# Altium PCB PCB1.PcbDoc
Units mil, origin at the board's own origin, x right, y up, seen from the top; angles counter-clockwise.
Board outline 3290 x 1870 mil, 2 copper layers (Top Layer, Bottom Layer); 100 components, 62 nets, 292 pads, 26 vias.
Unrouted connection lines stored in the file: 85.
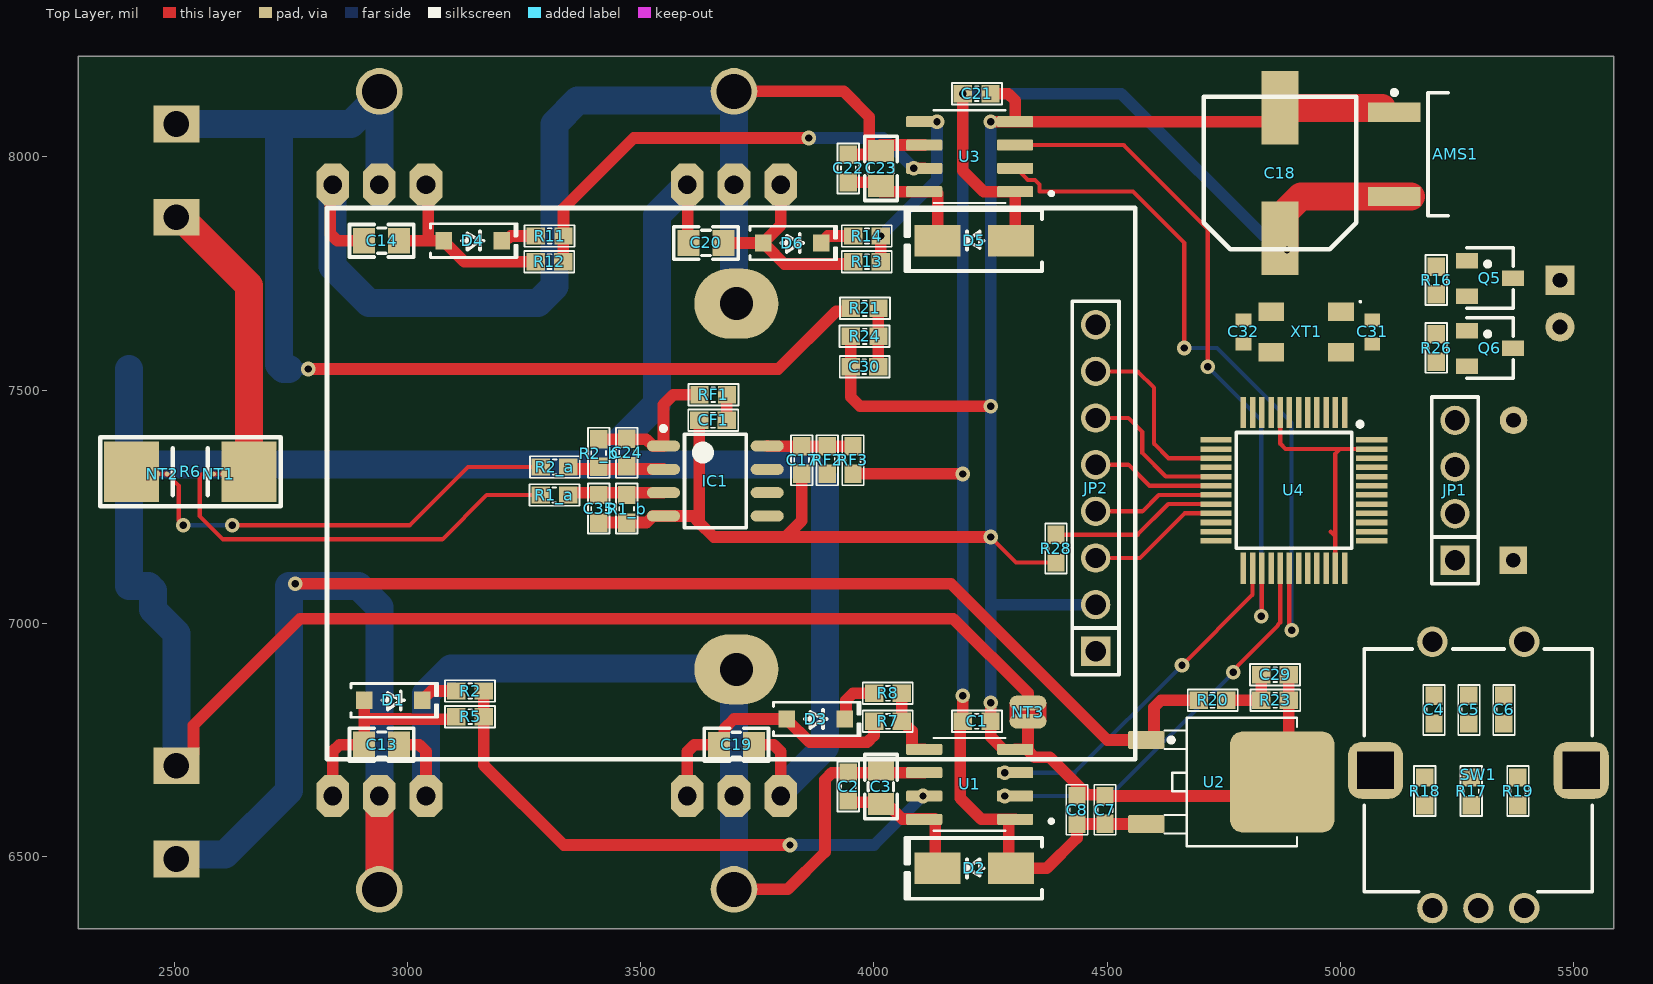
[diagram p0: Top Layer view]
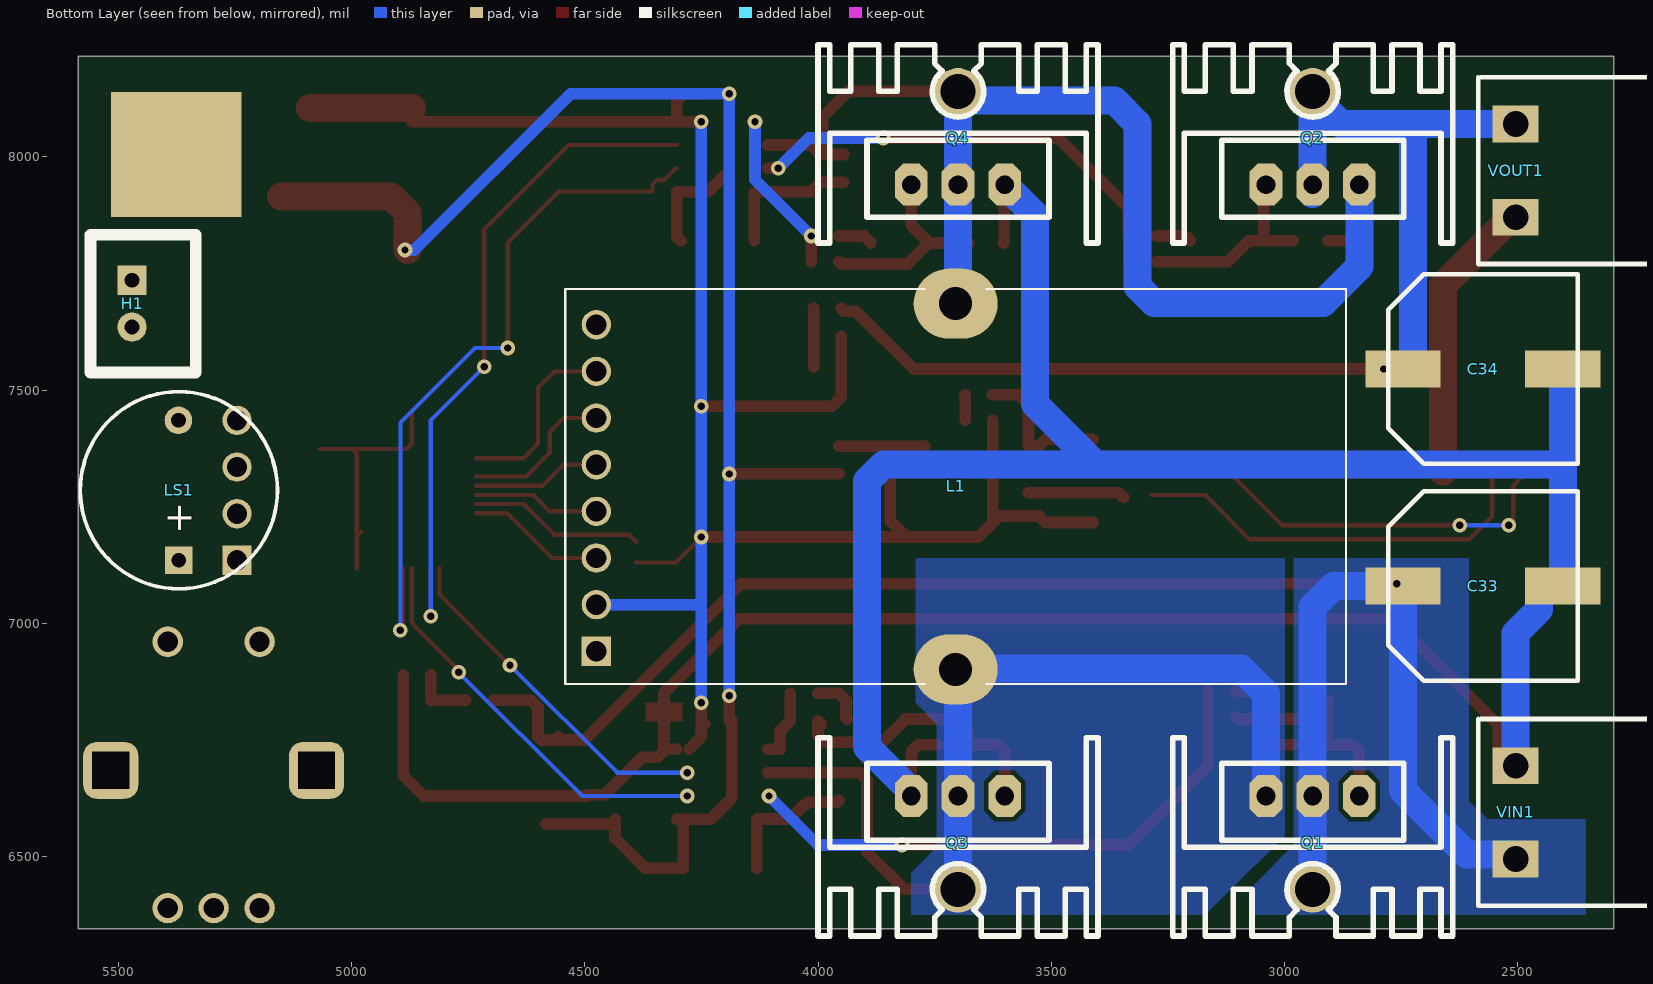
[diagram p1: Bottom Layer view, seen from below]

## Layer stack, top to bottom
Top Solder: solder mask 0.4, Solder Resist, Dk 3.5
Top Layer: signal copper 1.4
Dielectric 1: dielectric 12.6, FR-4, Dk 4.8
Bottom Layer: signal copper 1.4
Bottom Solder: solder mask 0.4, Solder Resist, Dk 3.5

## Board outline
2295,6345 2295,8215 5585,8215 5585,6345

## Design rules (kind name [scope] priority, off if disabled: settings)
Clearance [All] p1: gap=9 ignorepadtopadclearanceinfootprint=FALSE
PlaneConnect [All] p1: planeconnectstyle=Direct reliefexpansion=20 reliefentries=4 reliefconductorwidth=10 reliefairgap=10
PolygonConnect [All] p1: connectstyle=Direct reliefconductorwidth=10 reliefentries=4 polygonreliefangle="90 Angle" airgapwidth=10
RoomDefinition Sheet2 [InComponentClass('Sheet2')] p1: confinementstyle=ConfineIn formatcopy=TRUE lockcomponents=FALSE outline 7045,1060 19970,1060 19970,4730 7045,4730
RoutingVias [All] p1: holewidth=15.75 width=31.5 viastyle="Through Hole" minholewidth=15.75 minwidth=31.5 maxholewidth=15.75 maxwidth=31.5
SolderMaskExpansion [All] p1: expansion=4 istentingtop=FALSE
Width [All] p1: maxlimit=60 minlimit=9 preferedwidth=25
29 further rules are at their usual default settings.

## Components (designator, comment, footprint, x,y, rotation, side; value= is the part's Value field where it differs from the comment)
AMS1 "AMS1117" "TO 252" 5048.86,7863.62 r0 top
BT1 "Nut Nhan 2 Chan SMD 3x6x2.5" "Nut Nhan 2 Chan SMD 3x6x2.5" 8050,4455 r90 top
C1 "104" "tu 0603" 4220,6790 r0 top
C2 "104" "tu 0603" 3945,6650 r90 top
C3 "104" "tu 0805" 4015,6650 r270 top
C4 "104" "tu 0603" 5200,6815 r270 top
C5 "104" "tu 0603" 5275,6815 r270 top
C6 "104" "tu 0603" 5350,6815 r270 top
C7 "104" "tu 0603" 4495,6600 r90 top
C8 "104" "tu 0603" 4435,6600 r90 top
C9 "104" "tu 0603" 4360,8685 r0 top
C10 "104" "tu 0603" 5215,8520 r270 top
C11 "104" "tu 0603" 4720,8650 r90 top
C12 "104" "tu 0603" 4920,8650 r90 top
C13 "100" "tu 0805" 2945,6740 r180 top
C14 "100" "tu 0805" 2945,7819.87 r180 top
C15 "1000uF" "tu hoa 10mm" 4595,2691.73 r180 bottom
C16 "1000uF" "tu hoa 10mm" 2815,2690 r0 bottom
C17 "104" "tu 0603" 3845,7350 r270 top
C18 "100uF" "tu nhom 8 (f)" 4870,7965 r90 top
C19 "100" "tu 0805" 3705,6740 r0 top
C20 "100" "tu 0805" 3640,7815 r180 top
C21 "104" "tu 0603" 4220,8135 r0 top
C22 "104" "tu 0603" 3945,7975 r270 top
C23 "104" "tu 0805" 4015,7975 r270 top
C24 "100" "tu 0603" 3470,7366 r270 top
C25 "102" "tu 0603" 2935.47,4145 r0 top
C26 "0.1uF" CAPC1608X09L 3255,4345 r270 top
C27 "0.1uF" CAPC1608X09L 3155,4345 r270 top
C28 "0.1uF" CAPC1608X09L 3360,4340 r270 top
C29 "102" "tu 0603" 4859.53,6890 r180 top
C30 "102" "tu 0603" 3979.53,7550 r0 top
C31 "10pF" CAPC1608X09L 5067.53,7624.39 r90 top
C32 "10pF" CAPC1608X09L 4791.76,7624.39 r270 top
C33 "1000uF" "tu nhom 10 (G)" 2575,7080 r180 bottom
C34 "1000uF" "tu nhom 10 (G)" 2575,7545 r180 bottom
C35 "100" "tu 0603" 3410,7245.47 r90 top
CF1 "104" "tu 0603" 3655,7435 r0 top
D1 "S4" "DIODE SOD-123" 2970,6835 r0 top
D2 "SS34" "DIODE SMA" 4215,6475 r180 top
D3 "S4" "DIODE SOD-123" 3875,6795 r0 top
D4 "S4" "DIODE SOD-123" 3140,7820 r0 top
D5 "SS34" "DIODE SMA" 4215,7820 r180 top
D6 "S4" "DIODE SOD-123" 3825,7815 r0 top
D7 "SS34" "DIODE SMA" 6045,5606.26 r90 top
H1 "FAN" XH2.54M-2 5470,7735 r270 bottom
IC1 "LM358 SOP8" "SOP 8" 3660,7305 r0 top
JP1 "debug" "JP 1x4 DT" 5245,7135 r90 top
JP2 "lcd_1.8 inch" "JP 1x8 DT" 4475,6940 r90 top
L1 "ATCA-08-251M-V" IND_ATCA-08-251M-V 3705,7293.27 r90 bottom locked
L3 "LED 0805" LED-0805-Red 12020,4585 r0 top
LS1 "Coi Chip Speaker" "Coi Chip Speacker" 5370,7135 r90 bottom
NT1 "0.25mm" NetTie_0.25mm 2604.68,7320 r180 top net-tie
NT2 "0.25mm" NetTie_0.25mm 2465.32,7320 r0 top net-tie
NT3 "NetTie_2mm" NetTie_2mm 4330,6829.37 r270 top net-tie
NTC1 "10k" MF52 2937.27,4056.52 r0 top
Q1 "IRFZ44" QTO-220H3 2840,6630 r0 bottom locked
Q2 "IRFZ44" QTO-220H3 3040,7940 r180 bottom
Q3 "IRFZ44" QTO-220H3 3600,6630 r0 bottom locked
Q4 "IRFZ44" QTO-220H3 3800,7940 r180 bottom
Q5 "HF" SOT-23 5320,7740 r270 top value=C9014
Q6 "HF" SOT-23 5320,7590 r270 top value=C9014
R1_a "10K" "Tro smd 0603" 3315,7275 r0 top
R1_b "30K" "Tro smd 0603" 3470,7245.47 r90 top
R2 "2.2R" "Tro smd 0603" 3134.53,6855 r180 top
R2_a "10K" "Tro smd 0603" 3315.47,7335 r0 top
R2_b "30K" "Tro smd 0603" 3410,7365 r90 top
R5 "10R" "Tro smd 0603" 3134.53,6800 r180 top
R6 "0.01R" "tro smd 2512" 2535,7325 r0 top
R7 "10R" "Tro smd 0603" 4030,6790 r180 top
R8 "2.2R" "Tro smd 0603" 4030,6850 r180 top
R11 "2.2R" "Tro smd 0603" 3305,7830 r180 top
R12 "10R" "Tro smd 0603" 3304.53,7775 r180 top
R13 "10R" "Tro smd 0603" 3985,7775 r180 top
R14 "2.2R" "Tro smd 0603" 3985,7830 r180 top
R15 "10k" "tro smd 0603" 3065,4145 r180 top
R16 "4.7K" "Tro smd 0603" 5205,7735 r90 top
R17 "10k" "Tro smd 0603" 5280,6640 r90 top
R18 "10k" "Tro smd 0603" 5180,6640 r90 top
R19 "10k" "Tro smd 0603" 5380,6640 r90 top
R20 "10k" "tro smd 0603" 4725.47,6835 r0 top
R21 "10k" "tro smd 0603" 3980,7675 r0 top
R22 "10k" "Tro smd 0603" 3720,4155 r0 top
R23 "100k" "tro smd 0603" 4859.53,6835 r0 top
R24 "100k" "tro smd 0603" 3980,7615 r180 top
R25 "10k" "Tro smd 0603" 4215,4655 r0 top
R26 "4.7K" "Tro smd 0603" 5205,7590 r90 top
R27 "10k" "Tro smd 0603" 3940,4450 r90 top
R28 "10k" "Tro smd 0603" 4390,7160 r90 top
RF1 "10K" "Tro smd 0603" 3655.47,7490 r0 top
RF2 "0R" "Tro smd 0603" 3900,7350 r270 top
RF3 "0R" "Tro smd 0603" 3955,7350 r270 top
SW1 "482024764004" 482024764004 5295,6685 r270 top
U1 "IR2101S" SOIC127P600X175-8N 4205,6655 r180 top
U2 "78M12 SMD TO252" TO252 4729.33,6660 r270 top
U3 "IR2101S" SOIC127P600X175-8N 4205,8000 r180 top
U4 "STM32F103C8T6" LQFP-48_19.6_393_58X11_SMD 4900,7285 r270 top
VIN1 "CON 2 EDG5.08" "CON 2 2EDG5.08" 2505,6695 r270 bottom
VOUT1 "CON 2 EDG5.08" "CON 2 2EDG5.08" 2505,8070 r270 bottom
XT1 "8 MHz" DFN220P320X110-4N 4926.11,7624.39 r180 top

## Footprints (in the part's own frame and the unit in brackets; to place one, negate y for a bottom-side part, rotate by r counter-clockwise, add the part's x,y. Pads: shape width x height; smd on the part's side, far side on the other; paste and mask are expansions set on the pad)
482024764004 [mm]
  round 1.65 hole 1.1: 1(-7,-2.5) 2(-7,2.5) A(7.5,-2.5) B(7.5,2.5) C(7.5,0)
  rrect50% 3.1x3 hole 2 square: S1(0,5.6) S2(0,-5.6)
  silkscreen extent -6.6,-6.2 6.6,6.2, body extent -7.32,-6.81 7.8,6.81, height 20.1
CAPC1608X09L [mm]
  rect 0.7x0.85 smd: 1(-0.65,0) 2(0.65,0)
  body extent -0.85,-0.45 0.85,0.45, height 0.9
"Coi Chip Speacker" [mm]
  rect 1.5x1.5 hole 0.8: 1(0,0)
  round 1.5 hole 0.8: 2(7.62,0.013)
  silkscreen extent -1.55,-5.38 9.18,5.36, body extent -2.22,-6 13.24,6, height 4.5
"CON 2 2EDG5.08" [mm]
  rect 2x2.5 hole 1.4: 1(0,0) 2(5.08,0)
  silkscreen extent -2.54,-2.03 7.62,10.21, body extent -2.5,-1.75 7.58,10.25, height 3.15
DFN220P320X110-4N [mm]
  rect 1.4x1 smd: 1(-1.9,-1.1) 3(1.9,1.1) G(-1.9,1.1) G(1.9,-1.1)
  silkscreen extent -3,-1.7 -2.9,-1.6, body extent -2.55,-1.65 2.55,1.65, height 1.1
"DIODE SMA" [mm] "SMA"
  rect 2.5x1.7 smd: 1(-2,0) 2(2,0)
  silkscreen extent -3.68,-1.65 3.75,1.65, body extent -2.6,-1.37 2.6,1.37, height 2.4
"DIODE SOD-123" [mm] "SOD-123"
  rect 0.9x0.95 smd: 1(-1.575,0) 2(1.575,0)
  silkscreen extent -2.3,-0.92 2.41,0.92, body extent -1.86,-0.78 1.86,0.77, height 1.35
IND_ATCA-08-251M-V [mm]
  oval 3.81x4.572 hole 1.8: 1(-9.95,0) 2(9.95,0)
  silkscreen extent -10.75,-21.25 10.75,21.25, body extent -21.45,-10.75 21.45,10.75, height 21.45
"JP 1x4 DT" [mm] "4 pins, 1 row, straight, gold plating"
  rect 1.6x1.6 hole 1.1: 1(0,0)
  round 1.6 hole 1.1: 2(2.54,0) 3(5.08,0) 4(7.62,0)
  silkscreen extent -1.27,-1.27 8.89,1.27, body extent -1.27,-1.27 8.89,1.27, height 8.54
"JP 1x8 DT" [mm] "8 pins, 1 row, straight, gold plating"
  rect 1.6x1.6 hole 1.1: 1(0,0)
  round 1.6 hole 1.1: 2(2.54,0) 3(5.08,0) 4(7.62,0) 5(10.16,0) 6(12.7,0) 7(15.24,0) 8(17.78,0)
  silkscreen extent -1.27,-1.27 19.05,1.27, body extent -1.27,-1.27 19.05,1.27, height 8.54
LED-0805-Red [mil]
  rect 50x55 smd: 1(0,0) 2(90,0)
  silkscreen extent 0,-35 90,35, body extent 5,-25 85,25, height 43
LQFP-48_19.6_393_58X11_SMD [mm] "48LQFP"
  rect 1.7x0.3 smd mask+0.076: 1(-4.238,2.75) 2(-4.238,2.25) 3(-4.238,1.75) 4(-4.238,1.25) 5(-4.238,0.75) 6(-4.238,0.25) 7(-4.238,-0.25) 8(-4.238,-0.75) 9(-4.238,-1.25) 10(-4.238,-1.75) 11(-4.238,-2.25) 12(-4.238,-2.75) 25(4.238,-2.75) 26(4.238,-2.25) 27(4.238,-1.75) 28(4.238,-1.25) 29(4.238,-0.75) 30(4.238,-0.25) 31(4.238,0.25) 32(4.238,0.75) 33(4.238,1.25) 34(4.238,1.75) 35(4.238,2.25) 36(4.238,2.75)
  rect 0.3x1.7 smd mask+0.076: 13(-2.75,-4.238) 14(-2.25,-4.238) 15(-1.75,-4.238) 16(-1.25,-4.238) 17(-0.75,-4.238) 18(-0.25,-4.238) 19(0.25,-4.238) 20(0.75,-4.238) 21(1.25,-4.238) 22(1.75,-4.238) 23(2.25,-4.238) 24(2.75,-4.238) 37(2.75,4.238) 38(2.25,4.238) 39(1.75,4.238) 40(1.25,4.238) 41(0.75,4.238) 42(0.25,4.238) 43(-0.25,4.238) 44(-0.75,4.238) 45(-1.25,4.238) 46(-1.75,4.238) 47(-2.25,4.238) 48(-2.75,4.238)
  silkscreen extent -3.72,-3.15 3.15,3.73, body extent -4.5,-4.5 4.5,4.5, height 1.7
MF52 [mm]
  round 1 hole 0.55: 1(-0.869,-0.039) 2(0.831,-0.039)
  silkscreen extent -1.27,-1.29 1.23,1.21, body extent -1.24,-1.24 1.26,2.56, height 5.45
NetTie_0.25mm [mm]
  round 0.25 smd paste-2 mask+0.102: 1(0,0) 2(0.5,0)
  Top Layer region: 0,0.125 0.5,0.125 0.5,-0.125 0,-0.125
NetTie_2mm [mm]
  oval 0.8x2 smd paste-2 mask+0.102: 1(0,0) 2(1,0)
  Top Layer region: 0,1 1,1 1,-1 0,-1
"Nut Nhan 2 Chan SMD 3x6x2.5" [mm] "Switch SMD type"
  rect 1.2x0.8 smd: 1(-3.5,0) 2(3.5,0)
  silkscreen extent -2.82,-1.85 2.82,1.85, body extent -3.05,-1.85 3.05,1.85, height 2.5
QTO-220H3 [mil] "TO-220 1-2-3"
  oct 70x90 hole 40: 1(0,0) 2(100,0) 3(200,0)
  round 100 hole 75: 2(100,200)
  silkscreen extent -200,-125 400,300, body extent -190,-102 392,323, height 984
SOIC127P600X175-8N [mm]
  rrect25% 1.97x0.6 smd: 1(-2.475,1.905) 2(-2.475,0.635) 3(-2.475,-0.635) 4(-2.475,-1.905) 5(2.475,-1.905) 6(2.475,-0.635) 7(2.475,0.635) 8(2.475,1.905)
  silkscreen extent -4.54,-2.52 1.95,2.53, body extent -3,-2.5 3,2.5, height 1.75
"SOP 8" [mm] "SOIC, 8-Leads, Body 4.9x3.9mm, Pitch 1.27mm, IPC High Density"
  oval 1.8x0.6 smd: 1(-2.825,1.905) 2(-2.825,0.635) 3(-2.825,-0.635) 4(-2.825,-1.905) 5(2.825,-1.905) 6(2.825,-0.635) 7(2.825,0.635) 8(2.825,1.905)
  silkscreen extent -2.95,-2.55 1.68,2.98, body extent -2.99,-2.45 3,2.45, height 1.6
SOT-23 [mm] "SOT 23 _ 1-3-2"
  rect 0.85x1.2 smd: 1(-0.94,-1.245) 2(0.985,-1.25) 3(0.005,1.25)
  silkscreen extent -1.65,-1.27 1.65,1.27, body extent -1.47,-1.33 1.53,1.17, height 1.06
TO252 [mm] "TO252"
  round 0.5 on Mech15: 0(0,0)
  rrect25% 1x2 smd: 1(-2.285,-3.7) 3(2.285,-3.7)
  rrect25% 5.5x5.7 smd: 2(0,3.7)
  silkscreen extent -3.5,-2.7 3.5,4.5, body extent -3.3,-3.95 3.3,5.76, height 2.31
"TO 252" [mm]
  rect 2.85x1.05 smd: 1(1.684,5.881) 3(1.684,1.301)
  rect 7.1x6.8 smd far side: 2(8.284,3.591)
  silkscreen extent 1.56,0.24 4.61,7.08, body extent 1.25,0.35 10.92,6.89, height 2.29
"Tro smd 0603" [mm] "Chip Capacitor, 2-Leads, Body 1,60x0,80mm, IPC Medium Density"
  rect 1x0.95 smd mask+0.076: 1(-0.75,0) 2(0.75,0)
  silkscreen extent -1.35,-0.58 1.37,0.58, body extent -0.82,-0.42 0.82,0.43, height 0.44
"tro smd 0603" [mm] "Chip Capacitor, 2-Leads, Body 1,60x0,80mm, IPC Medium Density"
  rect 1x0.95 smd mask+0.076: 1(-0.75,0) 2(0.75,0)
  silkscreen extent -1.35,-0.58 1.37,0.58, body extent -0.82,-0.42 0.82,0.43, height 0.44
"tro smd 2512" [mm]
  rect 3x3.3 smd: 1(-3.2,0) 2(3.2,0)
  silkscreen extent -4.9,-1.88 4.93,1.88, body extent -3.12,-1.57 3.18,1.58, height 0.82
"tu 0603" [mm] "Chip Capacitor, 2-Leads, Body 1,60x0,80mm, IPC Medium Density"
  rect 1x0.95 smd mask+0.076: 1(-0.75,0) 2(0.75,0)
  silkscreen extent -1.35,-0.58 1.37,0.58, body extent -0.8,-0.4 0.8,0.4, height 0.9
"tu 0805" [mm] "Compoment SMD 80x50mil"
  rect 1.2x1.4 smd: 1(-0.946,-0.003) 2(0.954,-0.003)
  silkscreen extent -1.75,-0.89 1.75,0.89, body extent -1.01,-0.64 1.01,0.63, height 0.61
"tu hoa 10mm" [mm]
  rect 2.1x2.1 hole 0.9: 1(-2.54,0)
  round 2.1 hole 0.9: 2(2.54,0)
  silkscreen extent -4.95,-4.96 4.93,4.92, body extent -5,-5 5.01,5, height 20.01
"tu nhom 8 (f)" [mm]
  rect 4x2 smd: 1(-3.55,0) 2(3.55,0)
  silkscreen extent -4.15,-4.15 4.15,4.15, body extent -4.85,-4.25 4.85,4.25, height 10.5
"tu nhom 10 (G)" [mm]
  rect 4.1x2 smd: 1(-4.35,0) 2(4.35,0)
  silkscreen extent -5.15,-5.15 5.15,5.15, body extent -5.9,-5.25 5.9,5.25, height 10.5
XH2.54M-2 [mm]
  rect 1.6x1.6 hole 0.8: 1(0,0)
  round 1.6 hole 0.8: 2(2.54,0)
  silkscreen extent -2.48,-2.26 5.02,3.46, body extent -2.48,-2.26 5.02,3.48, height 6.91

## Part data
C1 C2 C4 C5 C6 C7 C8 C9 C10 C11 C12 C21 C22: library part "Tu 0603 101 50V 10%", "Dán", Chung_Loai=Dán, Don_Vi=Con, Ma_Hang=MH004565, So_Chan=2, Ten_Linh_Kien="Tụ 0603 101-0.1nF 10% 50V"
C3 C23: library part "Tu 0805 101 50V 20%", "Dán", Chung_Loai=Dán, Don_Vi=Con, Ma_Hang=MH002806, So_Chan=2, Ten_Linh_Kien="Tụ 0805 101-0.1nF 50V 20%"
C13 C14 C19 C20: library part "Tu 0805 104 50V 10%", "Dán", Chung_Loai=Dán, Don_Vi=Con, Ma_Hang=MH004551, So_Chan=2, Ten_Linh_Kien="Tụ 0805 104-100nF 10% 50V"
C15 C16: library part "Tu Hoa 1000uF 10V 10x12", "Cắm", Chung_Loai=Cắm, Don_Vi=Con, Ma_Hang=MH006614, So_Chan=2, Ten_Linh_Kien="Tụ Hóa 1000uF 10V 10x12MM"
C17 C24 C35 CF1: library part "Tu 0603 106 16V 20%", "Dán", Chung_Loai=Dán, Don_Vi=Con, Ma_Hang=MH004848, So_Chan=2, Ten_Linh_Kien="Tụ 0603-10uF 20% 16V"
C18: library part "Tu Nhom 100uF 50V", "Dán", Chung_Loai=Dán, Don_Vi=Con, Ma_Hang=MH002223, So_Chan=2, Ten_Linh_Kien="Tụ Nhôm 100uF 50V 8x10.2MM"
C25 C29 C30: library part "Tu 0603 104 50V 10%", "Dán", Chung_Loai=Dán, Don_Vi=Con, Ma_Hang=MH004568, So_Chan=2, Ten_Linh_Kien="Tụ 0603 104-100nF 10% 50V"
C26 C27 C28: library part GRM188R71H104KA93D, "CAP CER 0.1UF 50V X7R 0603", Manufacturer="Murata Electronics North America", Operating Temperature="-55°C ~ 125°C", Package / Case="0603 (1608 Metric)", Ratings=-, Supplier Part Number 1=490-1519-2-ND, Temperature Coefficient=X7R, Tolerance=±10%, Voltage - Rated=50V, Applications="General Purpose", Capacitance=0.1uF, Category=Capacitors, ComponentLink1Description=http://www.murata.com/~/media/webrenewal/support/library/catalog/products/capacitor/mlcc/c02e.ashx?la=en-us, ComponentLink1URL=http://www.murata.com/~/media/webrenewal/support/library/catalog/products/capacitor/mlcc/c02e.ashx?la=en-us, Features=-, Height - Seated (Max)=-, Lead Spacing=-, Lead Style=-, Manufacturer Part Number=GRM188R71H104KA93D, Mounting Type="Surface Mount, MLCC", Packaging="Tape & Reel (TR)", Part Status=Active, Pricing 1="4000=0.01822, 8000=0.01663, 12000=0.01584 (USD)", Pricing 2="1=0.12, 10=0.084, 100=0.0396, 500=0.02778, 1000=0.023 (USD)", RoHS="RoHS Compliant", Size / Dimension="0.063\" L x 0.032\" W (1.60mm x 0.80mm)", Stock=19812000, Supplier 1=Digi-Key, Supplier 2=Digi-Key, Supplier Part Number 2=490-1519-1-ND, Thickness (Max)="0.035\" (0.90mm)"
C31 C32: library part GRM188R71H104KA93D, "CAP CER 0.1UF 50V X7R 0603", Capacitance=0.1uF, Manufacturer="Murata Electronics North America", Operating Temperature="-55°C ~ 125°C", Package / Case="0603 (1608 Metric)", Ratings=-, Supplier Part Number 1=490-1519-2-ND, Temperature Coefficient=X7R, Tolerance=±10%, Voltage - Rated=50V, Applications="General Purpose", Category=Capacitors, ComponentLink1Description=http://www.murata.com/~/media/webrenewal/support/library/catalog/products/capacitor/mlcc/c02e.ashx?la=en-us, ComponentLink1URL=http://www.murata.com/~/media/webrenewal/support/library/catalog/products/capacitor/mlcc/c02e.ashx?la=en-us, Features=-, Height - Seated (Max)=-, Lead Spacing=-, Lead Style=-, Manufacturer Part Number=GRM188R71H104KA93D, Mounting Type="Surface Mount, MLCC", Packaging="Tape & Reel (TR)", Part Status=Active, Pricing 1="4000=0.01822, 8000=0.01663, 12000=0.01584 (USD)", Pricing 2="1=0.12, 10=0.084, 100=0.0396, 500=0.02778, 1000=0.023 (USD)", RoHS="RoHS Compliant", Size / Dimension="0.063\" L x 0.032\" W (1.60mm x 0.80mm)", Stock=19812000, Supplier 1=Digi-Key, Supplier 2=Digi-Key, Supplier Part Number 2=490-1519-1-ND, Thickness (Max)="0.035\" (0.90mm)"
C33 C34: library part "Tu Nhom 1000uF 10V", "Dán", Chung_Loai=Dán, Don_Vi=Con, Ma_Hang=MH007515, So_Chan=2, Ten_Linh_Kien="Tụ Nhôm 1000uF 10V"
D1 D3 D4 D6: library part "Diode S4", "Dán", Chung_Loai=Dán, Don_Vi=Con, Ma_Hang=MH005519, Ten_Linh_Kien="Diode S4 SOD123 ( 1N5819 SOD123)"
D2 D5 D7: library part "Diode SS34 ( 1N5822 )", "Dán", Chung_Loai=Dán, Don_Vi=Con, Ma_Hang=MH002104, Ten_Linh_Kien="Diode SS34 3A 40V SMA ( 1N5822 SS34A)"
H1: library part "Header 2P 2.54 Duc Thang", "Cắm", Chung_Loai=Cắm, Don_Vi=Con, Ma_Hang=MH001283, Ten_Linh_Kien="Header 2P XH2.54-2P Đực Thẳng"
IC1: "Dán", Chung_Loai=Dán, Don_Vi=Con, Ma_Hang=MH000609, Ten_Linh_Kien="LM358 SOP8"
JP1: library part "JP 1x4 2.54 Duc Thang", "Cắm", Chung_Loai=Cắm, Don_Vi=Con, Ma_Hang=MH000903, Ten_Linh_Kien="Jump Đơn Đực 2.54MM 1x40P Thẳng 11MM"
JP2: library part "JP 1x8 2.54 Duc Thang", "Cắm", Chung_Loai=Cắm, Don_Vi=Con, Ma_Hang=MH000903, Ten_Linh_Kien="Jump Đơn Đực 2.54MM 1x40P Thẳng 11MM"
L1: "250 ÂµH Unshielded Toroidal Inductor 10 A 27mOhm Max Radial, Vertical (Open)", Package=Package, Check_prices=https://www.snapeda.com/parts/ATCA-08-251M-V/Abracon/view-part/?ref=eda, MF="Abracon LLC", MP=ATCA-08-251M-V, SnapEDA_Link=https://www.snapeda.com/parts/ATCA-08-251M-V/Abracon/view-part/?ref=snap
L3: library part "LED 0805 Do", "Dán", Chung_Loai=Dán, Don_Vi=Con, Ma_Hang=MH000897, Ten_Linh_Kien="LED 0805 Màu Đỏ (Red)"
LS1: "Còi chip"
NT1 NT2: library part NetTie_0.25mm
NTC1: library part NCP15XH103F03RC, "THERMISTOR 10K OHM NTC 0402 SMD"
Q1 Q2 Q3 Q4: "HEXFET N-Channel Power MOSFET"
Q5 Q6: library part "Trans C1815 HF SMD", "SOT-23"
R1_a R1_b R2 R2_a R2_b R5 R7 R8 R11 R12 R13 R14 R16 R17 R18 R19 R22 R25 R26 R27 R28 RF1 RF2 RF3: library part "Tro 0603 5% 10R", "Dán", Chung_Loai=Dán, Don_Vi=Con, Ma_Hang=MH006317, So_Chan=2, Ten_Linh_Kien="Trở 0603 5% 10R"
R6: library part "Tro 2512 1% 0.01R", "Dán", Chung_Loai=Dán, Don_Vi=Con, Ma_Hang=MH004912, So_Chan=2, Ten_Linh_Kien="Trở 2512 1% R010-0.01R 1W"
R15 R20 R21 R23 R24: library part "Tro 0603 5% 10k", "Dán", Chung_Loai=Dán, Don_Vi=Con, Ma_Hang=MH006316, So_Chan=2, Ten_Linh_Kien="Trở 0603 5% 10k"
SW1: "WS-ENTV Mechanical Incremental Encoder Switch, Plastic Shaft without bushing, 24Pulse/360°, 24positi", Insulation Resistance=100MΩ, Manufacturer="Wurth Elektronik", Operating Temperature Max=85°C, Operating Temperature Min=-40°C, Rated Current=10mA, Category="Encoder Switches", ComponentLink1Description="Website Link", ComponentLink1URL=https://www.we-online.com/redexpert/article/482024764004?ad, ComponentLink2Description="Datasheet Link", ComponentLink2URL=https://www.we-online.com/redexpert/spec/482024764004?ad, Detent=24positions, Electrical Life Encoder=30000Cycles, Electrical Life Switch=20000Cycles, Height=20mm, Length=13.2mm, Manufacturer Part Number=482024764004, Match Code=WS-ENTV, Mount="Through Hole", Operation Force=300g, Packaging=Tray, Resolution=24Pulse/360°, Width=12.4mm
U1 U3: "Half-Bridge Gate Driver IC Non-Inverting 8-SOIC", Package="SOIC-8 Infineon", Check_prices=https://www.snapeda.com/parts/IR2101S/Infineon/view-part/?ref=eda, MF="Infineon Technologies", MP=IR2101S, SnapEDA_Link=https://www.snapeda.com/parts/IR2101S/Infineon/view-part/?ref=snap
U2: library part "78M05 SMD TO252", "Dán", Chung_Loai=Dán, Don_Vi=Con, Ma_Hang=MH001917, Ten_Linh_Kien="78M05 TO252"
U4: library part IC_STM32F103C8T6, "ARM® Cortex®-M3 STM32F1 Microcontroller IC 32-Bit 72MHz 64KB (64K x 8) FLASH 48-LQFP (7x7)", Alternate Part Number-1=NA, Case/Package=LQFP48, Manufacturer=STMicroelectronics, Manufacturer Part Number=STM32F103C8T6, Supplier Part Number-1=STM32F103C8T6, Supplier-1=LCSC
VIN1 VOUT1: "Cắm", Chung_Loai=Cắm, Don_Vi=Con, Ma_Hang=MH000759, Ten_Linh_Kien="CON 2 2EDG5.08-2P 5.08MM ( Xanh Cong)"
XT1: library part ABM3B-8.000MHZ-10-1-U-T, "Crystal 8MHz ±10ppm 10pF 200 Ohm -10°C ~ 60°C Surface Mount 4-SMD, No Lead (DFN, LCC)", Frequency Stability=±10ppm, Load Capacitance=10pF, Manufacturer="Abracon LLC", Operating Mode=Fundamental, Operating Temperature="-10°C ~ 60°C", Package / Case="4-SMD, No Lead", Ratings=-, Supplier Part Number 1=535-9721-1-ND, Category="Crystals, Oscillators, Resonators", ComponentLink1Description=http://www.abracon.com/Resonators/abm3b.pdf, ComponentLink1URL=http://www.abracon.com/Resonators/abm3b.pdf, Frequency Tolerance=±10ppm, Height - Seated (Max)="0.043\" (1.10mm)", Manufacturer Part Number=ABM3B-8.000MHZ-10-1-U-T, Mounting Type="Surface Mount", Packaging="Cut Tape (CT)", Part Status=Active, Pricing 1="1=0.69, 10=0.578, 50=0.5198, 100=0.462, 500=0.4389 (USD)", Pricing 2="1000=0.336, 3000=0.315, 5000=0.3045, 10000=0.294 (USD)", RoHS="RoHS Compliant", Size / Dimension="0.197\" L x 0.126\" W (5.00mm x 3.20mm)", Stock=35437, Supplier 1=Digi-Key, Supplier 2=Digi-Key, Supplier Part Number 2=535-9721-2-ND, Type="MHz Crystal"
BT1: Ma_Hang=MH001036, Ten="Nút Nhấn 2 Chân 3x6x2.5MM SMD"

## Via types
v1: diameter 31.5, hole 15.75, Top Layer to Bottom Layer, 26 vias

## Nets (pads, with @x,y where several pads share a name; then routed paths per layer and width w, separated by ;. In a path a pad name is that pad's centre, name@x,y a point inside that pad or via, vN(x,y) a via of type N, cw(c..) or ccw(c..) an arc to the next point about the centre after c; other vN are vias at no path point)
3v3: AMS1.2 C9.1 C10.1 C11.1 C12.1 JP1.1 JP2.1 JP2.8 R15.1 R17.2 R18.2 R19.2 R27.2 U4.9 U4.24 U4.48
+5: RF2.2
+12: AMS1.3 C1.1 C7.1 C8.1 C18.1 C21.1 D2.1 D5.1 D7.2 H1.1 LS1.1 RF3.2 U1.1 U2.3 U3.1 | length 3943.6
  Top Layer w25: RF3.2 4189.53,7320.47 v1(4190,7320) ; C1.1@4185,6791.8 4185,6625 4230,6580 U1.1@4289.43,6580 ; v1(4190,6845) 4190.47,6844.53 C1.1 ; C21.1 4190.47,7969.53 4235,7925 U3.1 4302.44,7828.7 D5.1 ; D2.1@4288.74,6475 4288.74,6579.31 U1.1@4289.43,6580 ; D2.1 4370,6475 4435,6540 C8.1 ; U1.1 U1.1@4289.43,6580 ; C8.1@4435,6579.49 4444.45,6570.04 U2.3
  Top Layer w60: C18.1@4879.37,7800 4879.37,7879.85 4914.52,7915 AMS1.3@5150.54,7915
  Bottom Layer w25: v1(4190,6845) v1(4190,7320) v1(4190,8135) 4530,8135 4865,7800 v1(4885,7800)
A0: JP2.5 U4.18 | length 276.9
  Top Layer w9: JP2.5 4545,7340 4590.16,7294.84 U4.18
buzzer: R26.1 U4.4
CLK: JP1.3 U4.37
CS: JP2.3 U4.21 | length 297.8
  Top Layer w9: JP2.3 4570,7140 4665.79,7235.79 U4.21
current_sense: CF1.2 RF1.2 U4.10 | length 55.2
  Top Layer w25: CF1.2 3684.76,7435.24 3684.76,7489.76 RF1.2
enc_a: C28.2 R19.1 SW1.A U4.38
enc_b: C27.2 R18.1 SW1.B U4.39
enc_c: C26.2 R17.1 SW1.1 U4.40
fan: R16.1 U4.3
GND: AMS1.1 BT1.1 C1.2 C4.2 C5.2 C6.2 C7.2 C8.2 C9.2 C10.2 C11.2 C12.2 C17.2 C18.2 C21.2 C25.1 C26.1 C27.1 C28.1 C29.1 C30.1 C31.1 C32.1 C35.1 CF1.1 IC1.4 JP1.4 JP2.2 L3.2 NT3.2 NTC1.1 Q5.2 Q6.2 R1_b.1 R22.2 R23.2 R24.2 R28.1 SW1.2 SW1.C U1.4 U2.2 U3.4 U4.8 U4.23 U4.35 U4.47 XT1.G | length 5825.2
  Top Layer w9: v1(4250,7185) 4304.53,7130.47 R28.1 ; U4.8 4870.47,7385 4881.89,7373.58 4998.58,7373.58 ; 4978.58,7196.42 4988.58,7186.42 ; U4.35 4988.58,7186.42 ; U4.47 4998.58,7373.58 ; 4988.58,7186.42 4988.58,7363.58 4998.58,7373.58
  Top Layer w25: C35.1 R1_b.1 3512.48,7215.94 3526.54,7230 IC1.4 3611.3,7230 3625.47,7215.83 ; CF1.1 3625.47,7215.83 ; C17.2 3845,7220 3810,7185 ; R24.2 3950.24,7614.76 3950.24,7550.24 C30.1 3950,7485 3970,7465 v1(4250,7465) ; C1.2@4242.34,6783.8 4250.24,6783.8 4250.24,6756.61 U1.4@4276.16,6730.69 ; C1.2 4250,6790.47 v1(4250,6830) ; C21.2 4287.8,8135 4302.44,8120.36 U3.4 ; v1(4250,7185) 3810,7185 ; v1(4250,8075) U3.4 ; U1.4 U1.4@4328.03,6730 ; NT3.2 4330,6731.97 U1.4@4328.03,6730 ; C18.2@4870,8075 U3.4 ; C29.1 R23.2 4889.06,6674.06 U2.2 4845,6630 4495,6630 4492.03,6632.97 4457.03,6632.97 4376.69,6713.31 4344.05,6713.31 4329.41,6727.96 4329.41,6728.62 U1.4@4328.03,6730 ; 3625.47,7215.83 3656.3,7185 3810,7185
  Top Layer w60: C18.2 5088.78,8104.76 AMS1.1@5089.06,8104.49
  Bottom Layer w25: v1(4250,6830) 4250,7040 ; v1(4250,8075) v1(4250,7465) v1(4250,7185) 4250,7040 ; JP2.2 4250,7040
HS1: C13.2 D1.1 Q1.1 R5.2 | length 463.6
  Top Layer w25: Q1.1 2840,6725.49 2854.64,6740.13 C13.2 2907.71,6740.42 2907.71,6795 ; D1.1 2907.71,6834.72 2907.71,6795 ; R5.2 3099.8,6794.8 3005.2,6794.8 3005,6795 2907.71,6795
HS2: C14.1 D4.1 Q2.1 R12.2 | length 454.4
  Top Layer w25: C14.1 3045,7820 ; Q2.1@3040,7919.82 Q2.1 3045,7935 3045,7919.82 3045,7820 ; R12.2 3220.4,7775 3220.2,7774.8 3122.21,7774.8 3083.21,7813.8 3077.99,7819.02 D4.1 3045,7820
IO: JP1.2 U4.34
LS1: C19.1 D3.1 Q3.1 R7.2 | length 606.2
  Top Layer w25: Q3.1 3600,6725.22 3614.64,6739.87 C19.1 3678.89,6750.99 3678.89,6773.89 3700,6795 D3.1 3812.99,6794.02 3862.01,6745 3985.36,6745 4000,6759.64 4000,6789.53 R7.2 3999.49,6790 3993.29,6783.8 R7.2@3993.29,6782.81
LS2: C20.1 D6.1 Q4.1 R13.2 | length 439.9
  Top Layer w25: C20.1 3677.3,7815.07 3762.93,7815.07 D6.1 ; Q4.1 3800,7852.99 3762.99,7815.98 D6.1 ; R13.2 3950.47,7770 3807.99,7770 3769.19,7808.8 3768.21,7808.8 3762.99,7814.02 D6.1
MISO: U4.16
MOSI: JP2.6 U4.17 | length 336.5
  Top Layer w9: JP2.6 4545,7440 4575,7410 4575,7365 4625.19,7314.81 4732.87,7314.81 U4.17
NetC2_1: C2.1 C3.2 D2.2 U1.8 | length 297.6
  Top Layer w25: C2.1@3955,6620.47 3959.02,6616.45 4020.84,6616.45 4024.87,6612.43 4028.8,6612.43 4060.54,6580.69 4129.88,6580.69 4131.26,6579.31 D2.2@4131.26,6475
NetC17_1: C17.1 IC1.8 RF2.1 RF3.1 | length 184
  Top Layer w25: IC1.8 3771.46,7379.76 3954.76,7379.76 RF3.1
NetC22_2: C22.2 C23.2 D5.2 U3.8 | length 302.9
  Top Layer w25: C22.2 3993.85,7945.47 4014.32,7925 U3.8 4133.15,7925 4136.26,7921.89 D5.2
NetC24_1: C24.1 IC1.1 R2_b.2 RF1.1 | length 319.5
  Top Layer w25: R2_b.2 3512.01,7394.53 3526.54,7380 IC1.1 3548.78,7468.78 3570,7490 RF1.1
NetC24_2: C24.2 IC1.2 R2_a.2 R2_b.1 | length 205.9
  Top Layer w25: R2_a.2 3349.31,7330.69 3548.09,7330.69 IC1.2
NetC31_2: C31.2 U4.5 XT1.1
NetC32_2: C32.2 U4.6 XT1.3
NetC35_2: C35.2 IC1.3 R1_a.2 R1_b.2 | length 208.4
  Top Layer w25: R1_a.2@3344.53,7270 3345.51,7270 3355.51,7280 IC1.3
NetD1_2: D1.2 R2.2 | length 81.9
  Top Layer w25: D1.2 3032.01,6835.98 3051.02,6855 R2.2
NetD3_2: D3.2 R8.2 | length 107.9
  Top Layer w25: D3.2 3940,6797.99 3940,6835 3955,6850 R8.2
NetD4_2: D4.2 R11.2 | length 78.2
  Top Layer w25: D4.2 3202.01,7820.98 3207.22,7826.2 3218.07,7826.2 3221.87,7830 R11.2
NetD6_2: D6.2 R14.2 | length 75.3
  Top Layer w25: D6.2 3887.01,7815.98 3901.02,7830 R14.2
NetD7_1: D7.1 H1.2 Q5.3
NetL3_1: L3.1 R25.2
NetLS1_2: LS1.2 Q6.3
NetNT1_1: NT1.1 R6.2 VOUT1.2 | length 615.4
  Top Layer w60: VOUT1.2 2514.84,7870 2660.98,7723.86 R6.2
NetQ5_1: Q5.1 R16.2
NetQ6_1: Q6.1 R26.2
NetR2_1: R2.1 R5.1 U1.7 | length 1214.3
  Top Layer w25: R2.1 R5.1 3164.06,6695.94 3335,6525 v1(3820,6525)
  Bottom Layer w25: v1(3820,6525) 4000,6525 v1(4105,6630)
NetR7_1: R7.1 R8.1 U1.5 | length 155.5
  Top Layer w25: R8.1 R7.1 4060.51,6790 4081.28,6769.23 4081.28,6730.69 4081.97,6730 U1.5
NetR11_1: R11.1 R12.1 U3.7 | length 977.7
  Top Layer w25: R12.1 3334.29,7775.24 R11.1@3334.29,7829.76 ; R11.1@3335.51,7830 R11.1 3334.53,7889.53 3485,8040 v1(3860,8040) ; v1(4085,7975) U3.7
  Bottom Layer w25: v1(3860,8040) 4020,8040 v1(4085,7975)
NetR13_1: R13.1 R14.1 U3.5 | length 349.9
  Top Layer w25: R13.1 v1(4014.53,7830)
  Bottom Layer w25: v1(4014.53,7830) 4135,7950.47 v1(4135,8075)
NetR22_1: R22.1 U4.44
NetR25_1: R25.1 U4.2
NetR28_2: R28.2 U4.20 | length 377.3
  Top Layer w9: R28.2@4390,7174.53 4390,7175.51 4404.2,7189.71 4405.19,7189.71 4405.47,7190 4565,7190 4630.47,7255.47 U4.20
PGND: C15.2 C16.2 C19.2 C20.2 C33.2 C34.2 NT2.1 NT3.1 Q3.3 Q4.3 R6.1 VIN1.1 | length 6185.3
  Top Layer w25: VIN1.1 2514.84,6695 2541.71,6721.87 2541.71,6781.71 2770,7010 4170,7010 4329.13,6850.87 4330,6850.87 NT3.1 ; Q4.3 3601.21,7938.79 3601.21,7816.35 C20.2 ; C19.2 3785.36,6739.87 3800,6725.22 Q3.3
  Bottom Layer w60: C34.2 2403.74,7340 ; VIN1.1 2505,6978.74 2454.45,7029.29 2454.45,7070.63 2445.08,7080 C33.2 2403.74,7340 ; Q4.3 3600,7930 3595,7925 3585,7925 3535,7875 3535,7470 3405,7340 ; Q3.3 3800,6640 3895,6735 3895,7304.85 3859.85,7340 3405,7340 ; 2403.74,7340 3405,7340
RESET: BT1.2 R27.1 U4.7
RST: JP2.4 U4.19 | length 272.7
  Top Layer w9: JP2.4 4575,7240 4610.16,7275.16 U4.19
SCK: JP2.7 U4.15 | length 405.5
  Top Layer w9: JP2.7 4565,7540 4600,7505 4600,7385 4631.1,7353.9 U4.15
SO1_N: NT2.2 R2_a.1 | length 942.2
  Top Layer w9: NT2.2 2510,7295 2510,7220 v1(2520,7210) ; v1(2625,7210) 3005,7210 3130,7335 R2_a.1
  Bottom Layer w9: v1(2520,7210) v1(2625,7210)
SO1_P: NT1.2 R1_a.1 | length 907.4
  Top Layer w9: NT1.2 2560.27,7320 2555,7314.73 2555,7230 2605,7180 3075,7180 3170,7275 R1_a.1
temp: C25.2 NTC1.2 R15.2 U4.13
TIM1_CH1: U1.2 U4.29 | length 871.6
  Top Layer w9: v1(4770,6895) 4765,6895 4865.75,6995.75 4865.75,6997.11 4870.47,7001.84 U4.29
  Bottom Layer w9: v1(4280,6630) 4505,6630 v1(4770,6895)
TIM1_CH1N: U1.3 U4.26 | length 746.1
  Top Layer w9: v1(4660,6910) 4811.42,7061.42 U4.26
  Bottom Layer w9: v1(4280,6680) 4430,6680 v1(4660,6910)
TIM1_CH2: U3.2 U4.30 | length 1539.4
  Top Layer w9: U3.2 4305,7975 4329.69,7950.31 4345.08,7950.31 4354.72,7940.67 4354.72,7925.28 4554.72,7925.28 4665,7815 v1(4665,7590) ; U4.30 4890,7117.99 4890,6990 v1(4895,6985)
  Bottom Layer w9: v1(4665,7590) 4735,7590 4895,7430 4895,7370 v1(4895,6985)
TIM1_CH2N: U3.3 U4.27 | length 1468.4
  Top Layer w9: U3.3 4535,8025 4715,7845 v1(4715,7550) ; v1(4830,7015) 4831.1,7016.1 U4.27
  Bottom Layer w9: v1(4715,7550) 4830,7435 4830,7084.54 v1(4830,7015)
V_IN: C4.1 C5.1 C6.1 C16.1 C33.1 Q1.2 R20.1 U2.1 VIN1.2 | length 3887
  Top Layer w25: v1(2760,7085) 4165,7085 4500.04,6749.96 U2.1@4563.98,6749.96 ; U2.1@4556.79,6757.15 U2.1@4563.98,6749.96 ; R20.1 4615,6835 4600,6820 4600,6757.15 4592.81,6749.96 U2.1@4563.98,6749.96
  Top Layer w60: Q1.2@2940,6430 Q1.2@2940,6630
  Bottom Layer w25: C33.1 2755,7080 v1(2760,7085)
  Bottom Layer w60: VIN1.2 2514.37,6504.37 2609.37,6504.37 2746.26,6641.26 C33.1 ; C33.1@2755,7080 2895,7080 2919.98,7055.02 2940,7035 2940,6630 Q1.2@2940,6465
V_OUT: C15.1 C34.1 Q2.2 R21.1 VOUT1.1 | length 2454.5
  Top Layer w25: v1(2787.6,7545) 3795,7545 3918.8,7668.8 3944.27,7668.8 R21.1
  Bottom Layer w25: C34.1 v1(2787.6,7545)
  Bottom Layer w60: VOUT1.1 2725,8070 ; C34.1 2734.37,7545 2725,7554.37 2725,8070 ; Q2.2@2940,7920 2940,8120 2929.18,8120 2879.18,8070 2725,8070
vin_sense: C29.2 R20.2 R23.1 U4.11 | length 130
  Top Layer w25: R20.2 R23.1 C29.2
vout_sense: C30.2 R21.2 R24.1 U4.12 | length 125.2
  Top Layer w25: C30.2 4009.29,7550.24 4009.29,7674.76 R21.2
VS1: C2.2 C3.1 C13.1 L1.1 Q1.3 Q3.2 U1.6 | length 2060.7
  Top Layer w25: C13.1 3025.36,6740.13 3040,6725.49 Q1.3 ; Q3.2@3700,6430 3815,6430 3895,6510 3895,6665 3909.76,6679.76 3955,6679.76 4024.87,6679.76 4107.32,6679.76 U1.6
  Bottom Layer w60: Q1.3@3040,6665 3040,6850 3093.27,6903.27 3690,6903.27 3700,6893.27 3700,6630 Q3.2@3700,6465
VS2: C14.2 C22.1 C23.1 L1.2 Q2.3 Q4.2 U3.6 | length 2628.3
  Top Layer w25: Q2.3 2835,7935 2835,7834.64 2849.64,7820 C14.2 ; Q4.2@3700,8140 3935,8140 3989.87,8085.13 C23.1@3989.87,8012.23 ; C22.1 3993.85,8004.53 4014.32,8025 U3.6
  Bottom Layer w60: Q2.3@2840,7920 2840,7765 2918.27,7686.73 3279.85,7686.73 3315,7721.88 3315,8070 3365,8120 3700,8120 3700,7940 L1.2@3700,7665
pads on no net: IC1.5 IC1.6 IC1.7 SW1.S1 SW1.S2 U2.0 U4.1 U4.14 U4.22 U4.25 U4.28 U4.31 U4.32 U4.33 U4.36 U4.41 U4.42 U4.43 U4.45 U4.46
copper on no net: | length 10900
  Top Layer w10: 2580,2275 5380,2275 5380,4925 2580,4925 2580,2275

## Polygon pours and split planes (outlines as drawn)
VS1 on Bottom Layer "NONET_L-01_P-001" (solid, pour order 1): 3000,6545 3000,7140 3790,7140 3790,6830 3745,6785 3745,6520 3800,6465 3800,6375 3170,6375 3130,6415
V_IN on Bottom Layer "NONET_L-01_P-001" (solid, pour order 0): 2355,6580 2355,6375 3065,6375 3065,6440 2980,6525 2980,7140 2605,7140 2605,6620 2565,6580

## Silkscreen, mask and mechanical layers (free items; w line width, h text height)
Top Overlay:
  lines w10: 2827.72,6708.9 4560,6708.9 4560,7890 2827.72,7890 2827.72,6708.9

## Text inside footprints (layer, text, board x,y; h text height)
LS1: Bottom Overlay "+" at 5342,7190.5 h60 r270